# EAGLE board alt-com (EAGLE 6.1)
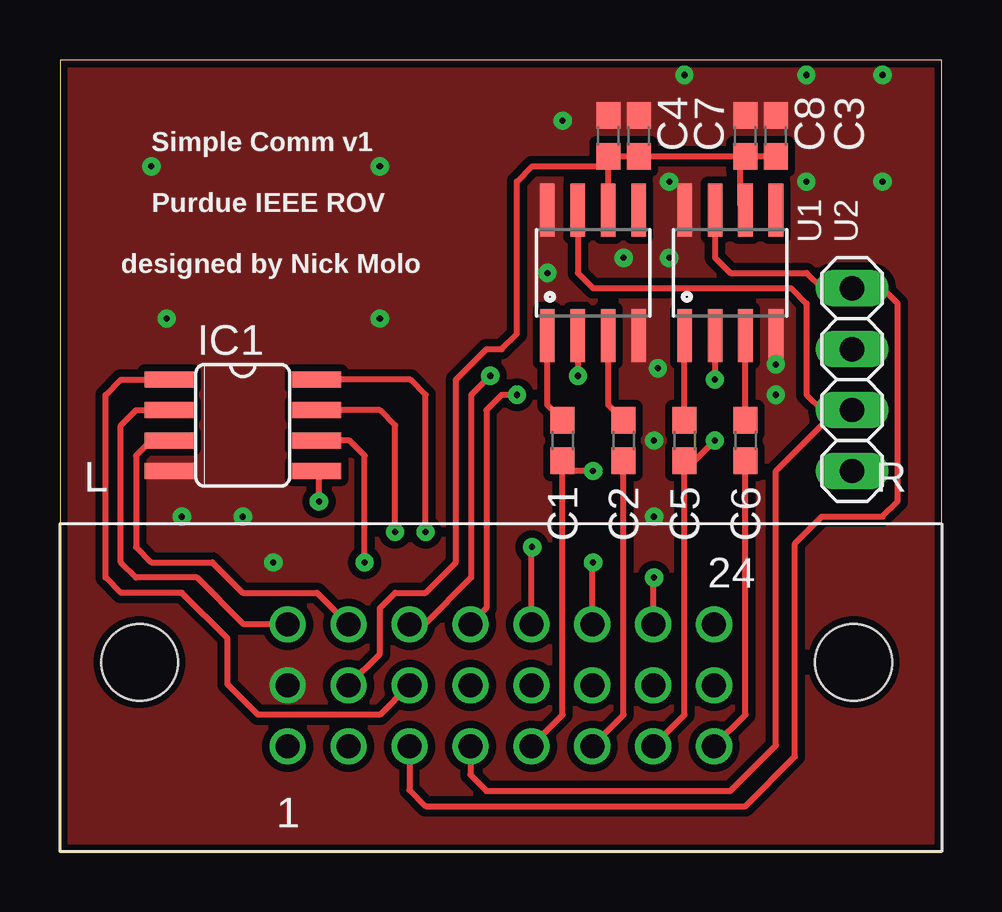
[diagram p0: board, top side]
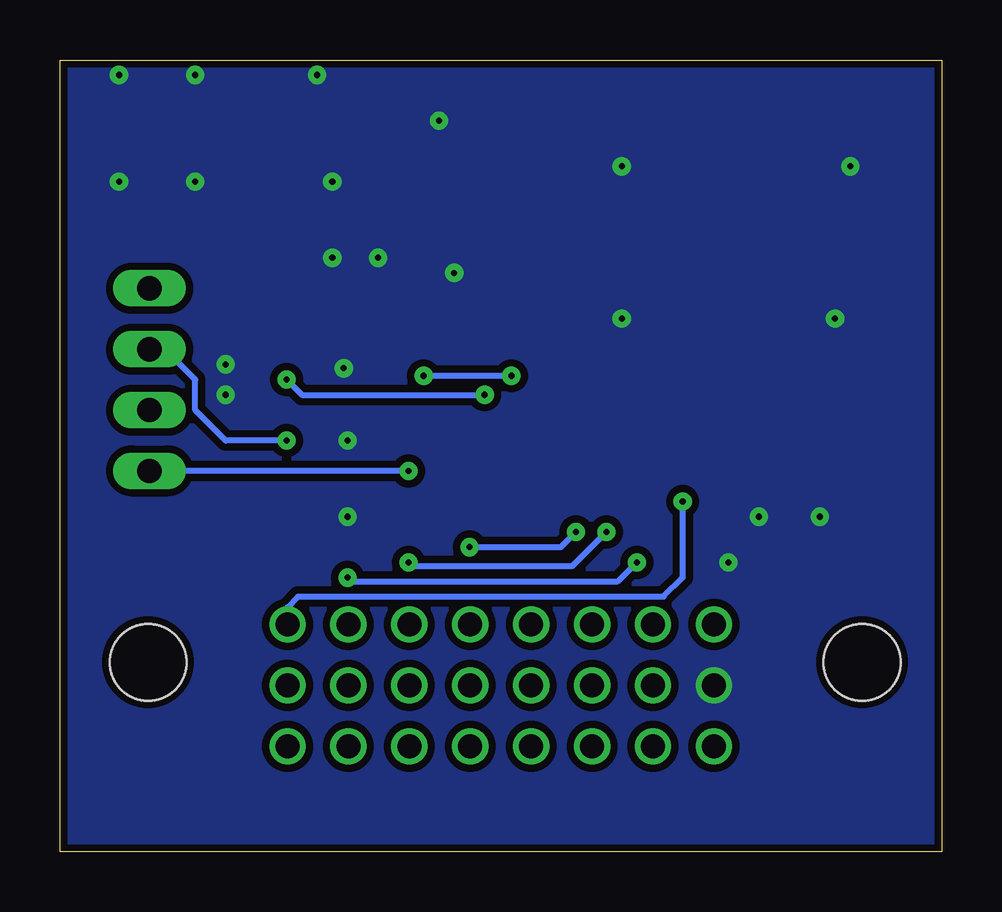
[diagram p1: board, bottom side, seen from below]

Size 36.75 x 33.01 mm. Coordinates in mm from the lower left corner, seen from the top.
Outline: 0,0 36.75,0 36.75,33.01 0,33.01 0,0
Copper layers (1*16): Top 0.035mm / dielectric 1.5mm / Bottom 0.035mm
Design rules: minimum track width 7mil, minimum drill 10mil, track to track 7mil, track to pad 7mil, pad to pad 7mil, via to via 7mil, smd to smd 7mil, copper to edge 10mil, drill to drill 8mil, minimum pad ring 10mil, minimum via ring 10mil, stop-mask expansion 4mil, vias tented up to drill 25mil, thermal gap 10mil

## Footprints (pad centres in the part's own frame; a part is rotated, then mirrored left to right if it is on the bottom)
C0603 = smd 1.1 x 1: 1 -0.85,0; 2 0.85,0
1X04 = drill 1.016 long: 1 -3.81,0; 2 -1.27,0; 3 1.27,0; 4 3.81,0
SO08 = smd 0.66 x 2.032: 1 -1.905,-3.073; 2 -0.635,-3.073; 3 0.635,-3.073; 4 1.905,-3.073; 5 1.905,3.073; 6 0.635,3.073; 7 -0.635,3.073; 8 -1.905,3.073
SO08' = smd 0.61 x 2.21: 1 -1.905,-2.616; 2 -0.635,-2.616; 3 0.635,-2.616; 4 1.905,-2.616; 5 1.905,2.616; 6 0.635,2.616; 7 -0.635,2.616; 8 -1.905,2.616
TEN60-S24-RA = drill 1: S1 9.49,4.4; S2 12.03,4.4; S3 14.57,4.4; S4 17.11,4.4; S5 19.65,4.4; S6 22.19,4.4; S7 24.73,4.4; S8 27.27,4.4; S9 9.49,6.94; S10 12.03,6.94; S11 14.57,6.94; S12 17.11,6.94; S13 19.65,6.94; S14 22.19,6.94; S15 24.73,6.94; S16 27.27,6.94; S17 9.49,9.48; S18 12.03,9.48; S19 14.57,9.48; S20 17.11,9.48; S21 19.65,9.48; S22 22.19,9.48; S23 24.73,9.48; S24 27.27,9.48 | hole 3.2: 3.32,7.9; 33.08,7.9

## Placement (x,y rotation side)
C1  0.01uF  [C0603]  20.95,17.14 270 top
C2  0.01uF  [C0603]  23.5,17.14 270 top
C3  0.1uF  [C0603]  29.84,29.84 90 top
C4  47uF  [C0603]  22.86,29.84 90 top
C5  0.01uF  [C0603]  26.04,17.14 270 top
C6  0.01uF  [C0603]  28.57,17.14 270 top
C7  0.1uF  [C0603]  24.13,29.84 90 top
C8  47uF  [C0603]  28.57,29.84 90 top
EMEREGENCY  [1X04]  33.02,19.68 90 top
IC1  MAX3467CPA  [SO08]  7.62,17.78 270 top
U1  [SO08']  22.23,24.13 0 top
U2  [SO08']  27.94,24.13 0 top
U$1  TEN60-S24-RA  [TEN60-S24-RA]  0,0 0 top

## Library data of the parts
C1-C8 = resistor
EMEREGENCY = pinhead
IC1 = maxim; OC_FARNELL: unknown; OC_NEWARK: unknown
U1 U2 = Personal_19
U$1 = BackplaneConnector

## Nets
+3V3: IC1.1 U$1.S11
+5V: C3.1 C4.1 C7.1 C8.1 U1.6 U2.6 U$1.S10
+12V: U$1.S16
AC_COUPLE: U$1.S12
COM_A: IC1.8 U$1.S21
COM_B: IC1.7 U$1.S22
COM_Y: IC1.5 U$1.S24
COM_Z: IC1.6 U$1.S23
GND: C3.2 C4.2 C7.2 C8.2 IC1.4 U1.4 U1.8 U2.4 U2.8 U$1.S9
N$1: C5.1 U2.1
N$2: C6.1 U2.3
N$3: C1.1 U1.1
N$4: C2.1 U1.3
S1: U$1.S1
S2: U$1.S2
S13: U$1.S13
S14: U$1.S14
S15: U$1.S15
TETHER_RX: IC1.2 U$1.S17
TETHER_TX: IC1.3 U$1.S18
VIDEO1: C1.2 EMEREGENCY.1 U$1.S5
VIDEO2: C2.2 U$1.S6
VIDEO3: C5.2 EMEREGENCY.3 U$1.S7
VIDEO4: C6.2 U$1.S8
VOUT1: EMEREGENCY.2 U1.7 U$1.S4
VOUT2: EMEREGENCY.4 U2.7 U$1.S3
VSEL1: U1.2 U$1.S19
VSEL2: U2.2 U$1.S20

## Tracks (layer width: path | path; a pad name or v marks a point on that pad's centre or on a via)
+3V3
  Top 0.254: U$1.S11 13.34,5.71 8.26,5.71 6.99,6.99 6.99,8.89 5.08,10.79 2.54,10.79 1.91,11.43 1.91,19.05 2.54,19.68 IC1.1
+5V
  Top 0.254: U2.6 28.36,26.96 28.36,28.78 C8.1 | U$1.S10 13.34,8.26 13.34,10.16 13.97,10.79 15.24,10.79 16.51,12.06 16.51,19.68 17.78,20.95 18.41,20.95 19.05,21.59 19.05,27.94 19.68,28.57 22.44,28.57 C4.1 | C4.1 C7.1 C8.1 | C8.1 C3.1 | U1.6 C4.1
COM_A  (via drill 0.25)
  Top 0.254: U$1.S21 19.65,12.66 v19.68,12.7 | v15.24,13.34 15.24,19.05 14.61,19.68 IC1.8
  Bottom 0.254: v19.68,12.7 15.88,12.7 v15.24,13.34
COM_B  (via drill 0.25)
  Top 0.254: U$1.S22 22.19,11.87 v22.23,12.06 | v13.97,13.34 13.97,17.78 13.34,18.41 IC1.7
  Bottom 0.254: v22.23,12.06 22.07,11.91 15.4,11.91 v13.97,13.34
COM_Y  (via drill 0.25)
  Top 0.254: v10.79,14.61 10.79,15.77 IC1.5
  Bottom 0.254: U$1.S24 27.27,10.2 26.83,10.64 11.59,10.64 10.79,11.43 v10.79,14.61
COM_Z  (via drill 0.25)
  Top 0.254: v12.7,12.06 12.7,16.51 12.06,17.14 IC1.6 | U$1.S23 24.73,11.39 v24.77,11.43
  Bottom 0.254: v24.77,11.43 24.61,11.27 13.49,11.27 v12.7,12.06
GND  (via drill 0.25)
  other vias: 8.89,12.06 7.62,13.97 5.08,13.97 4.45,22.23 13.34,22.23 13.34,28.57 3.81,28.57 20.95,30.48 20.32,24.13 23.5,24.77 25.4,24.77 24.92,20.16 24.77,17.14 24.77,13.97 29.84,20.32 29.84,19.05 25.4,27.94 26.04,32.38 31.11,32.38 34.29,32.38 34.29,27.94 31.11,27.94
  pour Top (isolate 0.305, no thermals): 0,0 0,50.16 36.83,50.16 36.83,49.53 36.83,0 0.64,0
  pour Bottom (isolate 0.305, no thermals): -1.91,0 -1.91,33.02 36.83,33.02 36.83,0
N$1
  Top 0.254: C5.1 U2.1
N$2
  Top 0.254: C6.1 U2.3
N$3
  Top 0.254: C1.1 20.32,18.63 U1.1
N$4
  Top 0.254: C2.1 22.86,18.63 U1.3
TETHER_RX
  Top 0.254: U$1.S17 7.67,9.48 5.71,11.43 3.17,11.43 2.54,12.06 2.54,17.78 3.17,18.41 IC1.2
TETHER_TX
  Top 0.254: IC1.3 3.81,17.14 3.17,16.51 3.17,12.7 3.81,12.06 6.35,12.06 7.62,10.79 10.71,10.79 U$1.S18
VIDEO1  (via drill 0.25)
  Top 0.254: U$1.S5 20.95,5.71 C1.2 20.95,15.88 v22.23,15.88
  Bottom 0.254: v22.23,15.88 EMEREGENCY.1
VIDEO2
  Top 0.254: U$1.S6 23.5,5.71 C2.2
VIDEO3  (via drill 0.25)
  Top 0.254: U$1.S7 26.04,5.71 C5.2 26.04,15.88 v27.3,17.14
  Bottom 0.254: v27.3,17.14 29.84,17.14 31.11,18.41 31.11,19.68 32.38,20.95 EMEREGENCY.3
VIDEO4
  Top 0.254: U$1.S8 28.57,5.71 C6.2
VOUT1
  Top 0.254: U1.7 21.59,24.13 22.23,23.5 30.48,23.5 31.11,22.86 31.11,19.05 31.75,18.41 32.38,18.41 | 32.38,18.41 EMEREGENCY.2 | U$1.S4 17.11,3.21 17.78,2.54 27.94,2.54 29.84,4.45 29.84,15.88 32.38,18.41
VOUT2
  Top 0.254: U2.7 27.3,24.77 27.94,24.13 31.11,24.13 31.75,23.5 EMEREGENCY.4 34.29,23.5 34.92,22.86 34.92,14.61 34.29,13.97 31.75,13.97 30.64,12.86 30.64,3.97 28.57,1.91 15.24,1.91 14.57,2.58 U$1.S3
VSEL1  (via drill 0.25)
  Top 0.254: U1.2 v21.59,19.84 | v17.94,19.84 17.14,19.05 17.14,11.43 15.2,9.48 U$1.S19
  Bottom 0.254: v21.59,19.84 v17.94,19.84
VSEL2  (via drill 0.25)
  Top 0.254: U2.2 v27.3,19.68 | v19.05,19.05 18.41,19.05 17.78,18.41 17.78,10.16 U$1.S20
  Bottom 0.254: v27.3,19.68 26.67,19.05 v19.05,19.05

## Text on the board
_tsilk: Simple Comm v1 | Purdue IEEE ROV | designed by Nick Molo